# EAGLE board MS20 Filter B001 (EAGLE 7.4.0)
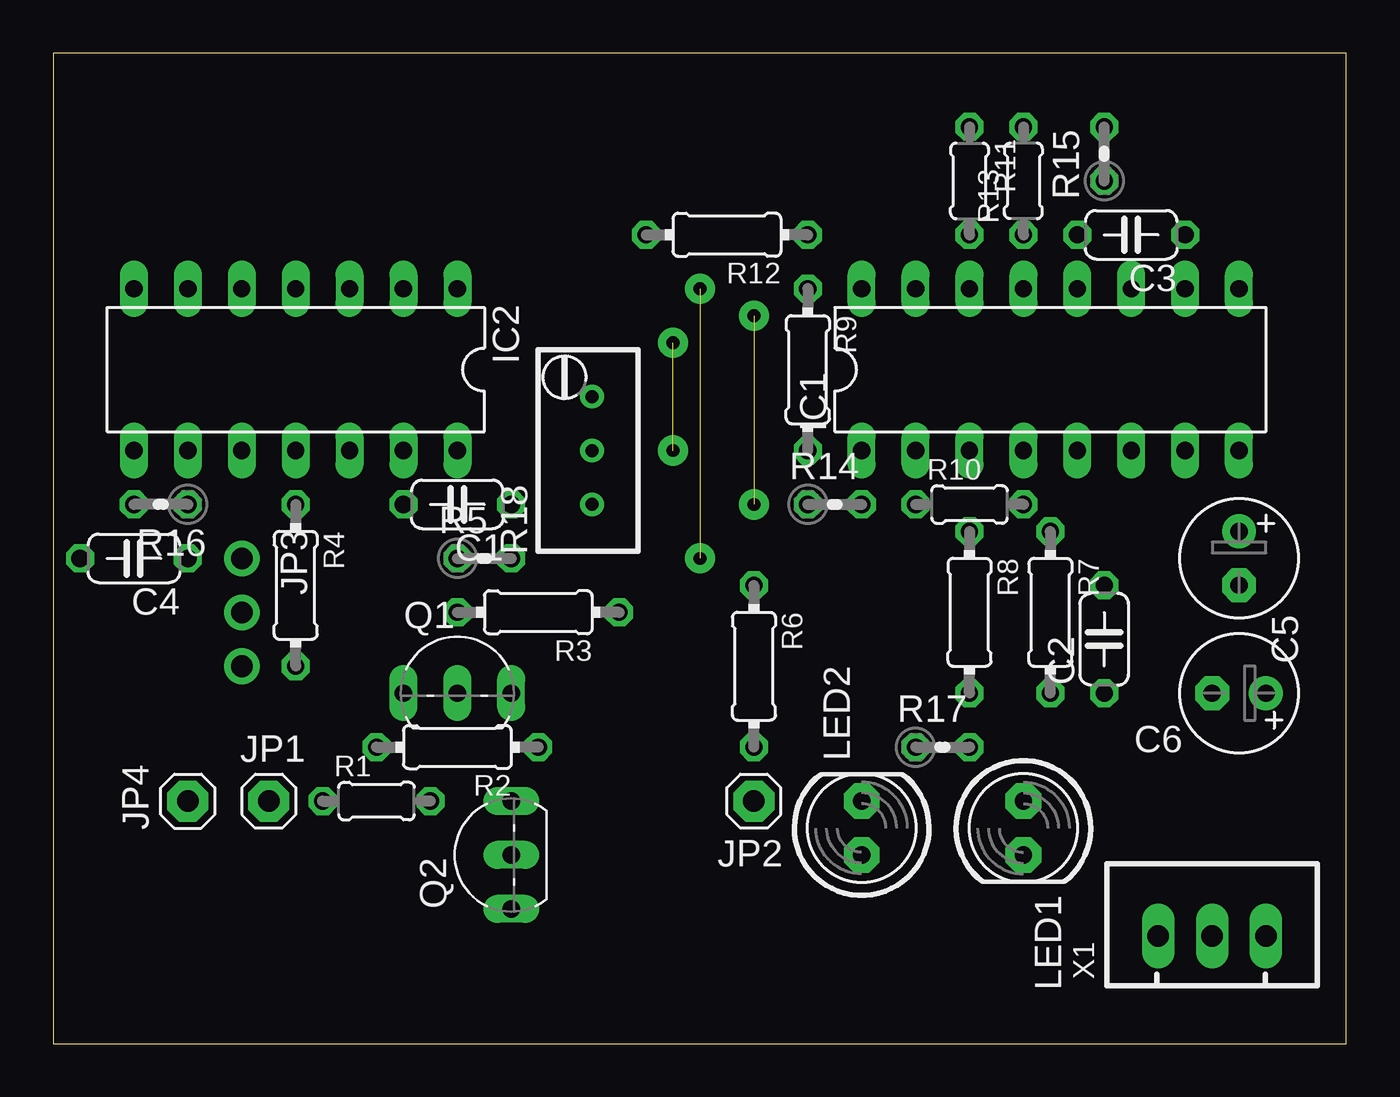
[diagram p0: board, top side]
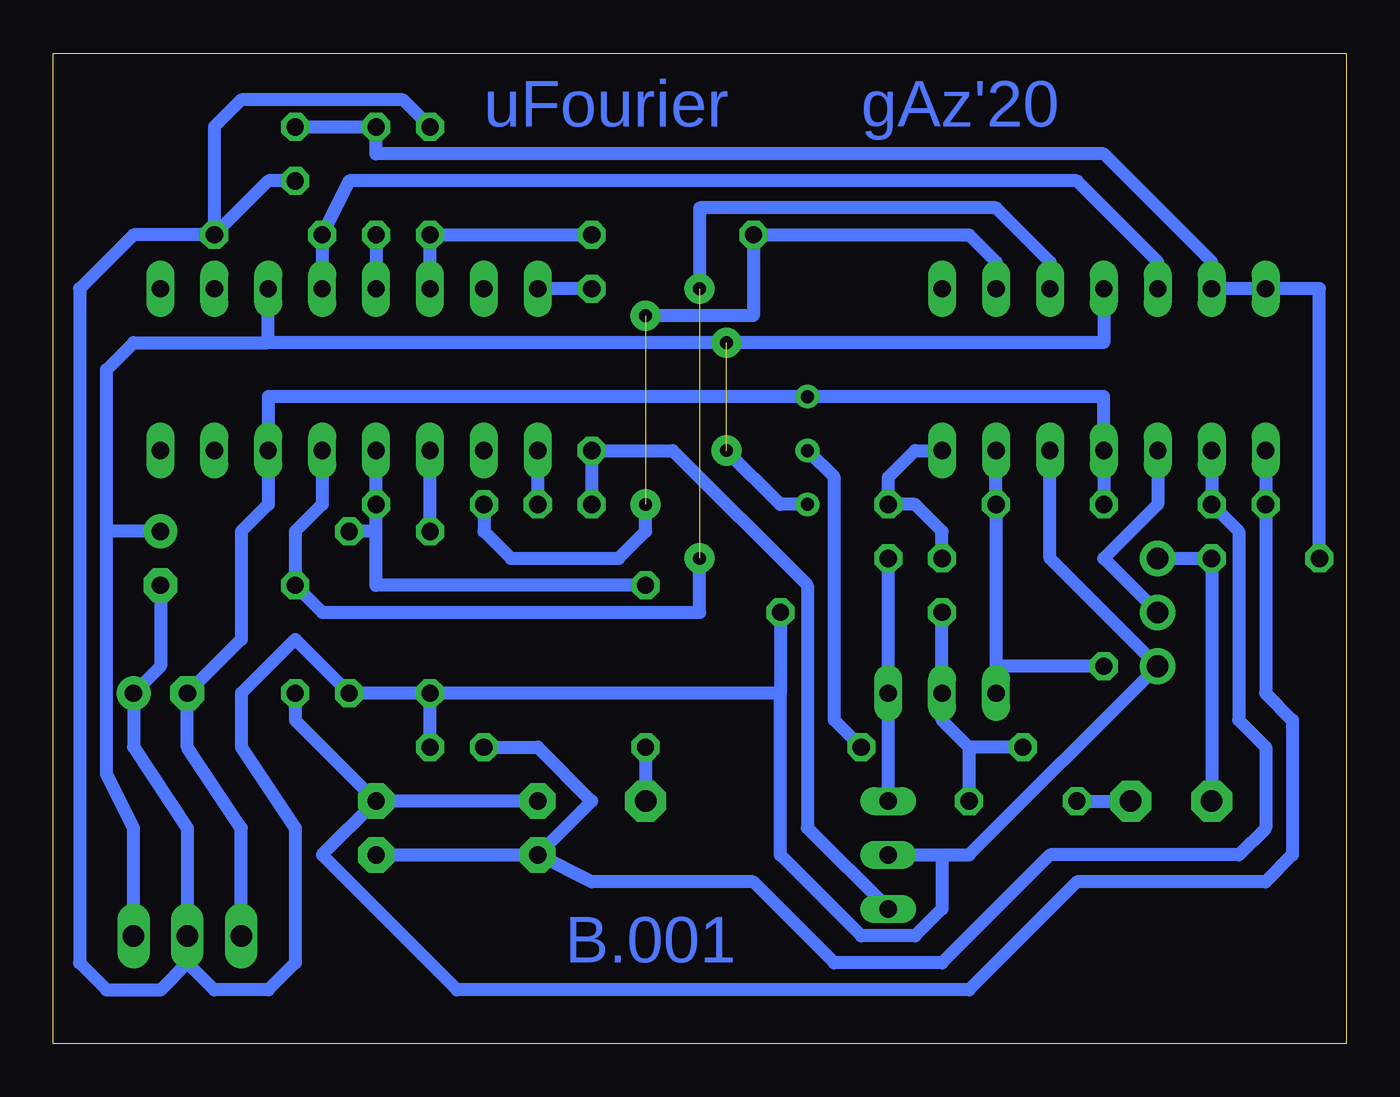
[diagram p1: board, bottom side, seen from below]

Size 60.94 x 46.66 mm. Coordinates in mm from the lower left corner, seen from the top.
Outline: 0,0 60.94,0 60.94,46.66 0,46.66 0,0
Copper layers (1*16): Top 0.035mm / dielectric 1.5mm / Bottom 0.035mm
Design rules "default": minimum track width 10mil, minimum drill 24mil, track to track 8mil, track to pad 8mil, pad to pad 8mil, via to via 8mil, smd to smd 8mil, copper to edge 40mil, drill to drill 8mil, minimum pad ring 10mil, minimum via ring 8mil, stop-mask expansion 4mil, vias tented up to drill 0mil, thermal gap 10mil

## Footprints (pad centres in the part's own frame; a part is rotated, then mirrored left to right if it is on the bottom)
C050-024X044 = drill 0.813 octagon: 1 -2.54,0; 2 2.54,0
E2,5-6 = drill 0.813 pad 1.6: + -1.27,0 | drill 0.813 pad 1.6 octagon: - 1.27,0
DIL16 = drill 0.813 long: 1 -8.89,-3.81; 2 -6.35,-3.81; 3 -3.81,-3.81; 4 -1.27,-3.81; 5 1.27,-3.81; 6 3.81,-3.81; 7 6.35,-3.81; 8 8.89,-3.81; 9 8.89,3.81; 10 6.35,3.81; 11 3.81,3.81; 12 1.27,3.81; 13 -1.27,3.81; 14 -3.81,3.81; 15 -6.35,3.81; 16 -8.89,3.81
DIL14 = drill 0.813 long: 1 -7.62,-3.81; 2 -5.08,-3.81; 3 -2.54,-3.81; 4 0,-3.81; 5 2.54,-3.81; 6 5.08,-3.81; 7 7.62,-3.81; 8 7.62,3.81; 9 5.08,3.81; 10 2.54,3.81; 11 0,3.81; 12 -2.54,3.81; 13 -5.08,3.81; 14 -7.62,3.81
1X01 = drill 1.016 pad 1.93 octagon: 1 0,0
1X03-CLEANBIG = drill 1.016 pad 1.676: 1 -2.54,0; 2 0,0; 3 2.54,0
LED5MM = drill 0.813 pad 1.676 octagon: A -1.27,0; K 1.27,0
TO92-EBC = drill 0.813 long: B 0,-1.27; C -2.54,-1.27; E 2.54,-1.27
0204/5 = drill 0.813 octagon: 1 -2.54,0; 2 2.54,0
0204/7 = drill 0.813 octagon: 1 -3.81,0; 2 3.81,0
0204V = drill 0.813 octagon: 1 -1.27,0; 2 1.27,0
RTRIMT93YA = drill 0.61: 1 0,-2.54; 2 0,0; 3 0,2.54
JST-XH-03-PACKAGE-LONG-PAD = drill 1.016 long: 1 -2.54,0; 2 0,0; 3 2.54,0

## Placement (x,y rotation side)
C1  4n7  [C050-024X044]  19.05,25.4 180 top
C2  1n  [C050-024X044]  49.53,19.05 90 top
C3  1n  [C050-024X044]  50.8,38.1 180 top
C4  470n  [C050-024X044]  3.81,22.86 180 top
C5  [E2,5-6]  55.88,22.86 270 top
C6  [E2,5-6]  55.88,16.51 180 top
IC1  LM13700N  [DIL16]  46.99,31.75 0 top
IC2  TL074P  [DIL14]  11.43,31.75 180 top
JP1  CV  [1X01]  10.16,11.43 0 top
JP2  IN  [1X01]  33.02,11.43 180 top
JP3  Resonance  [1X03-CLEANBIG]  8.89,20.32 270 top
JP4  OUT  [1X01]  6.35,11.43 90 top
LED1  [LED5MM]  45.72,10.16 270 top
LED2  [LED5MM]  38.1,10.16 90 top
Q1  BC558C  [TO92-EBC]  19.05,17.78 0 top
Q2  BC558C  [TO92-EBC]  20.32,8.89 90 top
R1  100k  [0204/5]  15.24,11.43 0 top
R2  100k  [0204/7]  19.05,13.97 180 top
R3  1.8k  [0204/7]  22.86,20.32 180 top
R4  470k  [0204/7]  11.43,21.59 270 top
R5  4k7  [0204V]  20.32,22.86 0 top
R6  10k  [0204/7]  33.02,17.78 270 top
R7  220R  [0204/7]  46.99,20.32 270 top
R8  220R  [0204/7]  43.18,20.32 270 top
R9  10k  [0204/7]  35.56,31.75 270 top
R10  10k  [0204/5]  43.18,25.4 0 top
R11  220R  [0204/5]  43.18,40.64 270 top
R12  10k  [0204/7]  31.75,38.1 180 top
R13  10k  [0204/5]  45.72,40.64 90 top
R14  10k  [0204V]  36.83,25.4 0 top
R15  220R  [0204V]  49.53,41.91 90 top
R16  10k  [0204V]  5.08,25.4 180 top
R17  1k8  [0204V]  41.91,13.97 0 top
R18  47k  [RTRIMT93YA]  25.4,27.94 0 top
X1  PWR  [JST-XH-03-PACKAGE-LONG-PAD]  54.61,5.08 0 top

## Library data of the parts
C1-C6 R1-R18 = rcl
IC1 = ota
IC2 = linear
JP1-JP4 LED1 LED2 = adafruit
Q1 Q2 = transistor-pnp
X1 = Rembrandt Electronics - JST XH Connectors v1-0

## Nets
GND: C3.1 C5.- C6.+ IC2.12 JP3.3 Q2.B R3.1 R7.2 R8.2 R11.1 R15.1 R17.2 X1.2
N$1: Q1.B R1.2 R2.2 R3.2
N$2: R2.1 R18.2
N$3: C1.2 IC2.13 Q1.C R4.2
N$4: JP1.1 R1.1
N$5: Q1.E Q2.E R5.2
N$6: IC2.9 LED1.K LED2.A R16.1 R17.1
N$7: C1.1 IC2.14 R5.1
N$8: Q2.C R9.2 R14.1
N$9: IC1.1 R14.2
N$10: JP2.1 R6.2
N$11: IC1.16 R9.1
N$12: IC1.4 R6.1 R7.1 R10.2
N$13: IC1.3 R8.1
N$15: C2.2 IC1.5 IC2.3
N$16: IC2.2 R10.1 R12.2
N$17: IC1.14 R11.2 R12.1
N$18: C4.2 IC2.6 IC2.7 R13.2 R15.2
N$19: IC1.13 R13.1
N$20: C3.2 IC1.12 IC2.5
N$21: IC2.10 JP3.2
N$22: C2.1 IC2.8 LED1.A LED2.K R16.2
N$23: C4.1 JP3.1 JP4.1
V-: C6.- IC1.6 IC2.11 R4.1 R18.3 X1.1
VCC: C5.+ IC1.11 IC2.4 R18.1 X1.3

## Tracks (layer width: path | path; a pad name or v marks a point on that pad's centre or on a via)
GND
  Bottom 0.61: R17.2 R8.2 | IC2.12 13.97,22.86 JP3.3 17.78,8.89 19.05,8.89 | Q2.B 19.05,8.89 | 19.05,8.89 19.05,6.35 20.32,5.08 22.86,5.08 26.67,8.89 26.67,16.51 | R3.1 26.67,16.51 | 26.67,16.51 R8.2 | R11.1 44.45,44.45 52.07,44.45 53.34,43.18 C3.1 | C5.- 55.88,17.78 C6.+ 57.15,13.97 54.61,10.16 X1.2 54.61,3.81 | R8.2 R7.2 49.53,19.05 52.07,16.51 52.07,13.97 49.53,10.16 49.53,3.81 50.8,2.54 53.34,2.54 54.61,3.81 | C3.1 57.15,38.1 59.69,35.56 59.69,3.81 58.42,2.54 55.88,2.54 54.61,3.81 | R15.1 50.8,40.64 C3.1
N$1
  Bottom 0.61: R3.2 Q1.B 19.05,15.24 17.78,13.97 | R2.2 17.78,13.97 | 17.78,13.97 R1.2
N$2
  Bottom 0.61: R18.2 24.13,26.67 24.13,15.24 R2.1
N$3
  Bottom 0.61: IC2.13 C1.2 16.51,17.78 | R4.2 16.51,17.78 | 16.51,17.78 Q1.C
N$4
  Bottom 0.61: R1.1 JP1.1
N$5
  Bottom 0.61: Q2.E Q1.E R5.2
N$6
  Bottom 0.61: LED1.K LED2.A | R17.1 38.1,13.97 35.56,11.43 LED2.A | IC2.9 R16.1 5.08,24.13 5.08,15.24 3.81,13.97 3.81,10.16 5.08,8.89 13.97,8.89 19.05,3.81 24.13,3.81 27.94,7.62 35.56,7.62 LED2.A
N$7
  Bottom 0.61: IC2.14 20.32,27.94 21.59,26.67 C1.1 20.32,25.4 19.05,24.13 R5.1
N$8
  Bottom 0.61: Q2.C 25.4,10.16 25.4,21.59 31.75,27.94 R9.2 R14.1
N$9
  Bottom 0.61: R14.2 IC1.1
N$10
  Bottom 0.61: R6.2 JP2.1
N$11
  Bottom 0.61: R9.1 IC1.16
N$12
  Bottom 0.61: IC1.4 R10.2 45.72,24.13 | R6.1 45.72,21.59 45.72,24.13 | 45.72,24.13 R7.1
N$13
  Bottom 0.61: R8.1 IC1.3
N$14  (via drill 0.6 pad 1.42)
  other vias: 33.02,34.29
N$15  (via drill 0.6 pad 1.42)  (1 unrouted)
  Bottom 0.61: IC1.5 48.26,25.4 49.53,24.13 C2.2 48.26,20.32 30.48,20.32 30.48,22.86 | IC2.3 13.97,36.83 16.51,39.37 30.48,39.37 v30.48,35.56
N$16  (via drill 0.6 pad 1.42)  (1 unrouted)
  Bottom 0.61: IC2.2 16.51,36.83 17.78,38.1 R12.2 27.94,34.29 33.02,34.29 | R10.1 40.64,24.13 39.37,22.86 34.29,22.86 33.02,24.13 v33.02,25.4
N$17
  Bottom 0.61: IC1.14 R11.2 R12.1
N$18
  Bottom 0.61: R15.2 R13.2 45.72,41.91 11.43,41.91 6.35,36.83 IC2.6 IC2.7 1.27,35.56 C4.2
N$19
  Bottom 0.61: R13.1 IC1.13
N$20
  Bottom 0.61: IC1.12 C3.2 46.99,40.64 12.7,40.64 8.89,36.83 IC2.5
N$21
  Bottom 0.61: IC2.10 8.89,25.4 11.43,22.86 JP3.2
N$22
  Bottom 0.61: LED2.K LED1.A | IC2.8 R16.2 3.81,16.51 2.54,15.24 2.54,8.89 3.81,7.62 12.7,7.62 17.78,2.54 41.91,2.54 48.26,8.89 LED1.A | C2.1 49.53,15.24 LED1.A
N$23
  Bottom 0.61: JP3.1 C4.1 JP4.1
N$24  (via drill 0.6 pad 1.42)
  other vias: 30.48,22.86
V-
  Bottom 0.61: R4.1 IC2.11 11.43,30.48 R18.3 50.8,30.48 IC1.6 50.8,25.4 52.07,24.13 52.07,19.05 C6.- 54.61,13.97 52.07,10.16 X1.1
VCC  (via drill 0.6 pad 1.42)  (1 unrouted)
  Bottom 0.61: 50.8,33.02 IC1.11 | IC2.4 11.43,33.02 v29.21,33.02 50.8,33.02 | 50.8,33.02 57.15,33.02 58.42,31.75 58.42,24.13 | R18.1 26.67,25.4 v29.21,27.94 | X1.3 57.15,10.16 58.42,12.7 58.42,24.13 | C5.+ 58.42,24.13

## Text on the board
Bottom: gAz'20 | uFourier | B.001